# Altium PCB PCB1.PcbDoc
Units mm, origin at the board's own origin, x right, y up, seen from the top; angles counter-clockwise.
Board outline 85 x 60 mm, 2 copper layers (Top Layer, Bottom Layer); 28 components, 11 nets, 34 pads, 8 vias.
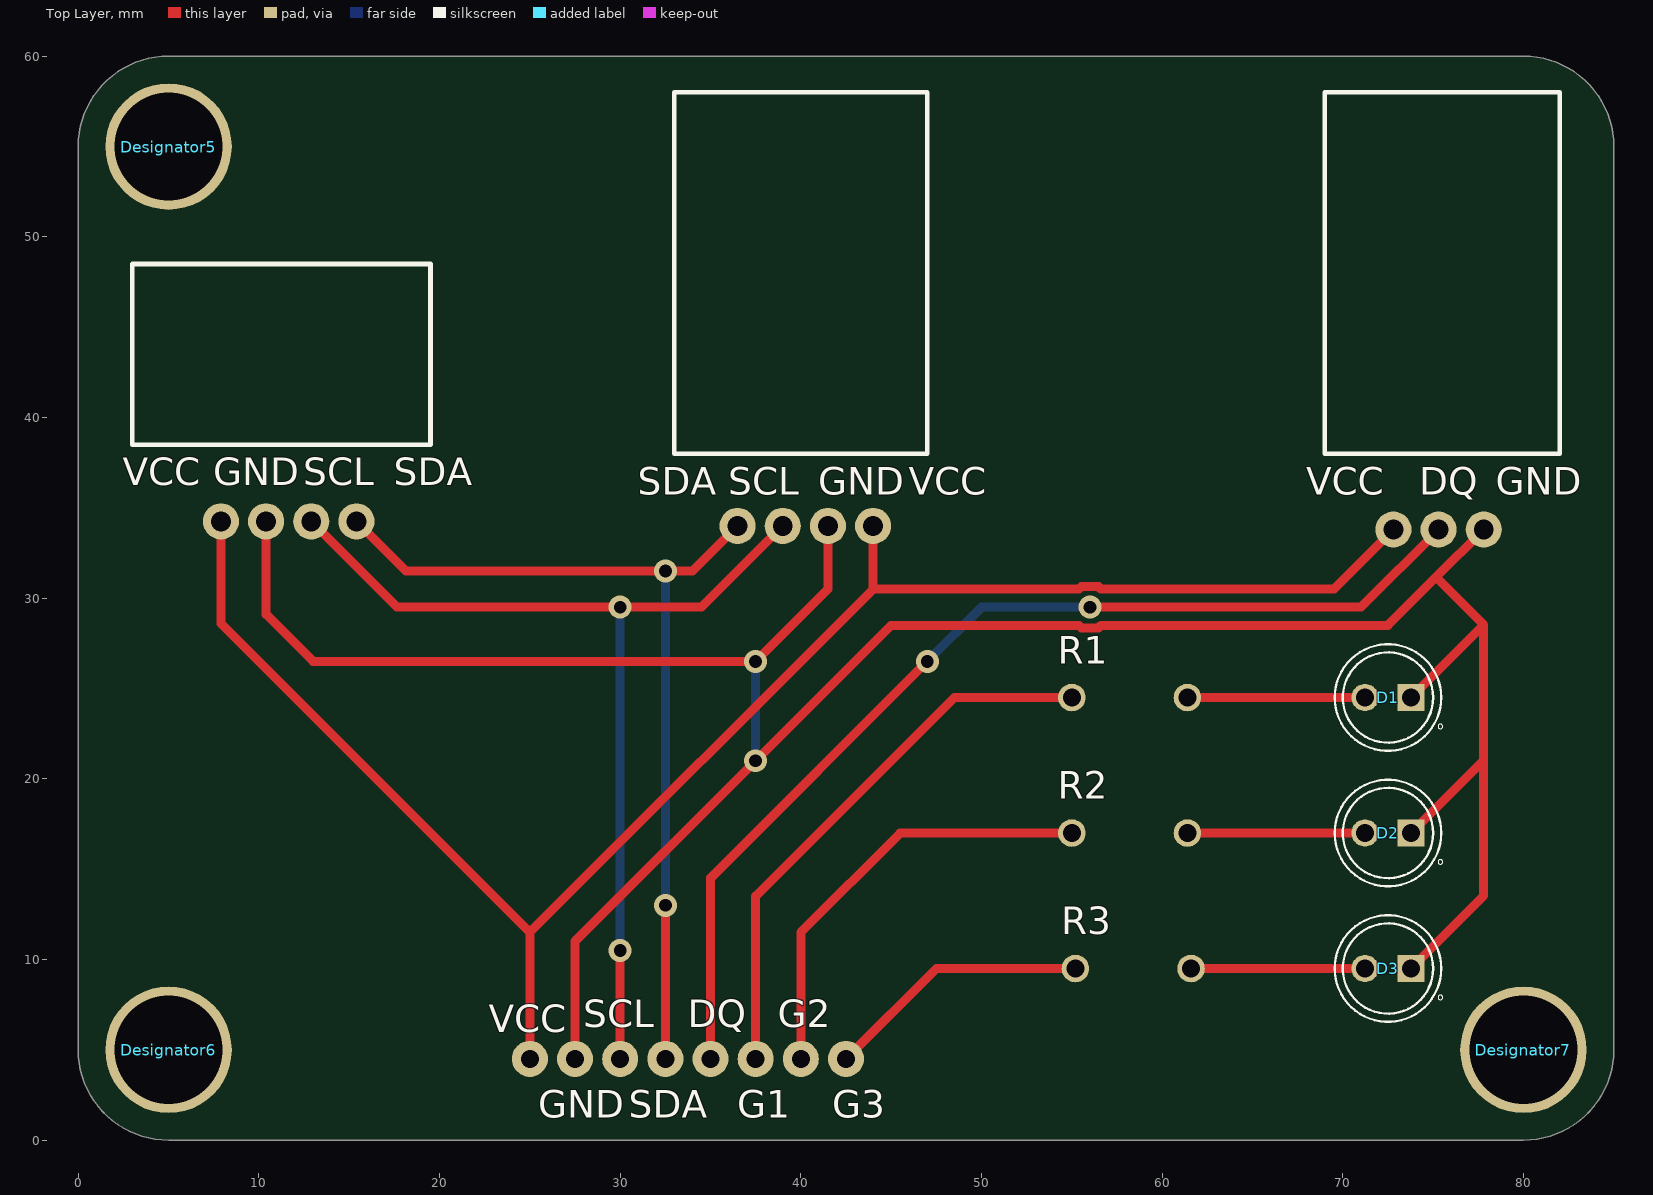
[diagram p0: Top Layer view]
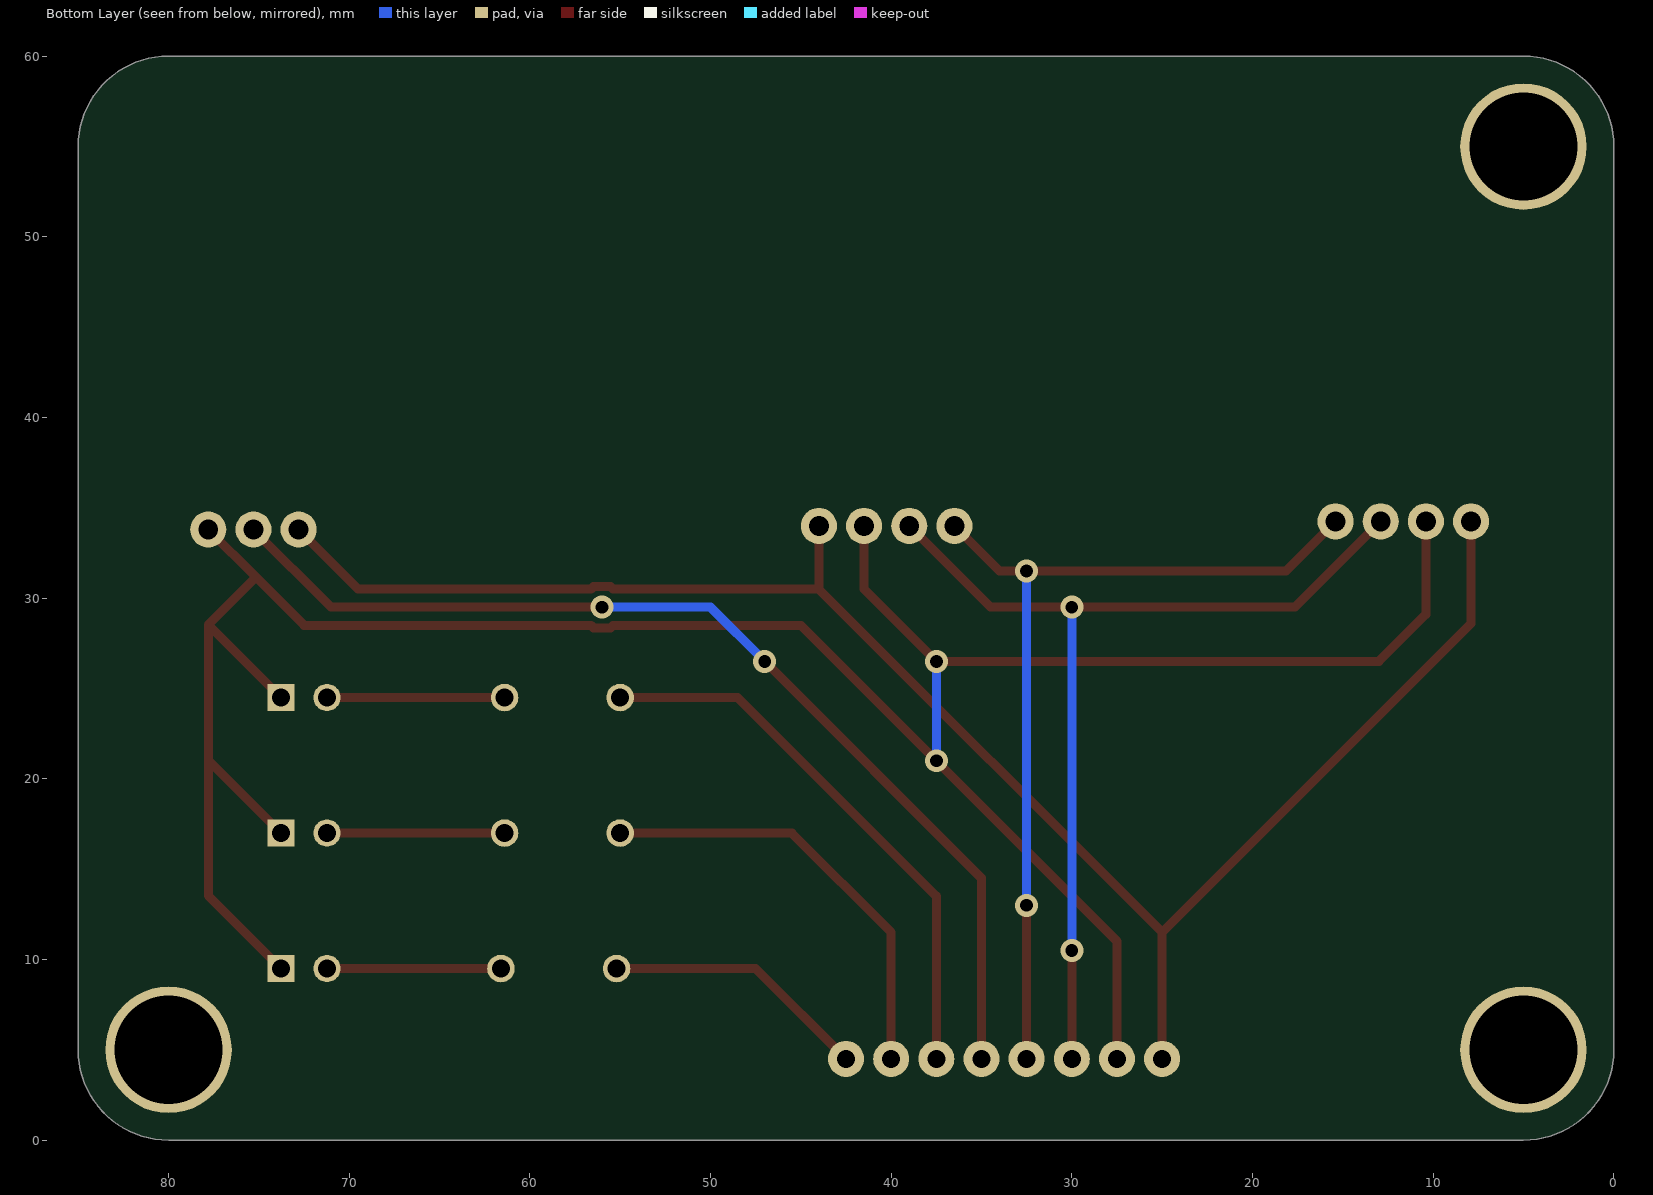
[diagram p1: Bottom Layer view, seen from below]
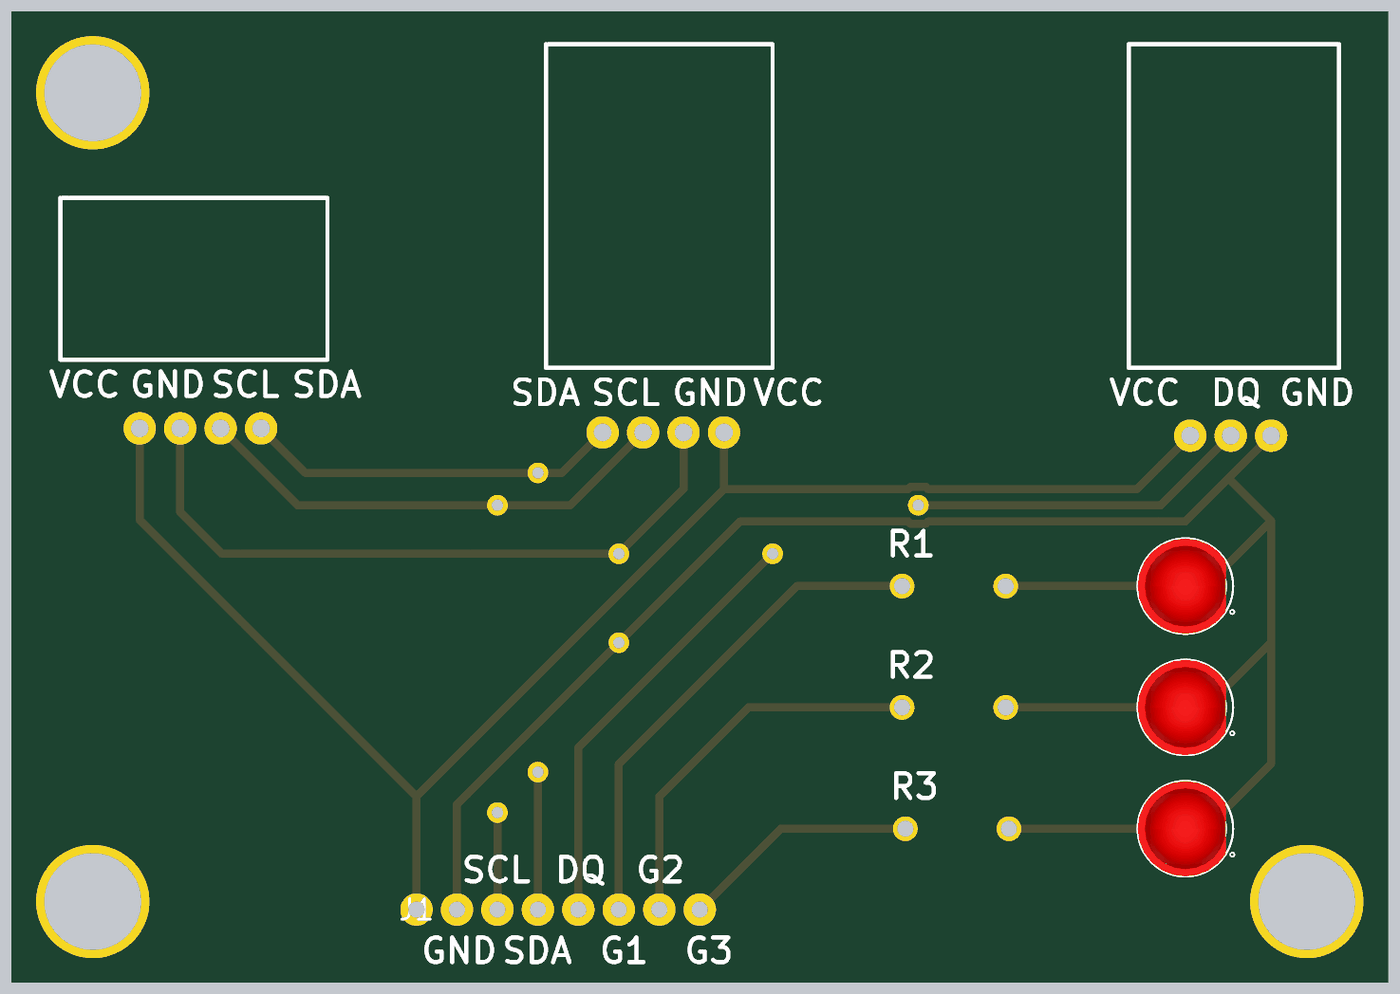
[diagram p2: 3D render of the assembled board from above, using the file's embedded part models]

## Layer stack, top to bottom
Top Solder: solder mask 0.0102, Solder Resist, Dk 3.5
Top Layer: signal copper 0.0356
Dielectric 1: dielectric 0.32, FR-4, Dk 4.8
Bottom Layer: signal copper 0.0356
Bottom Solder: solder mask 0.0102, Solder Resist, Dk 3.5

## Board outline
0,5 ccw(c5,5) 5,0 80,0 ccw(c80,5) 85,5 85,55 ccw(c80,55) 80,60 5,60 ccw(c5,55) 0,55

## Design rules (kind name [scope] priority, off if disabled: settings)
Clearance [All] p1: gap=0.254 ignorepadtopadclearanceinfootprint=FALSE
PolygonConnect [All] p1: connectstyle=Relief reliefconductorwidth=0.254 reliefentries=4 polygonreliefangle="90 Angle" airgapwidth=0.254
RoutingVias [All] p1: holewidth=0.711 width=1.27 viastyle="Through Hole" minholewidth=0.711 minwidth=1.27 maxholewidth=0.711 maxwidth=1.27
SolderMaskExpansion [All] p1: expansion=0 istentingtop=FALSE
Width [All] p1: maxlimit=1 minlimit=0.254 preferedwidth=0.5
30 further rules are at their usual default settings.

## Classes and differential pairs
component class Sheet1: D1 D2 D3 DQ G1 G2 G3 R1 R2 R3 VCC

## Components (designator, comment, footprint, x,y, rotation, side; value= is the part's Value field where it differs from the comment)
D1 "WP7113ID" LED_WP7113ID 72.5,24.5 r180 top
D2 "WP7113ID" LED_WP7113ID 72.5,17 r180 top
D3 "WP7113ID" LED_WP7113ID 72.5,9.5 r180 top
Designator5 "Comment" Mount_hole_pcb 5,55 r0 top
Designator6 "Comment" Mount_hole_pcb 5,5 r0 top
Designator7 "Comment" Mount_hole_pcb 80,5 r0 top
DQ "DQ" Pad_pcb 75.3,33.8 r0 top (schematic designator P10)
DQ "TS-101-X-A-1" SAMTEC_TS-101-X-A-1 35,4.5 r0 top (schematic designator J5)
G1 "TS-101-X-A-1" SAMTEC_TS-101-X-A-1 37.5,4.5 r0 top (schematic designator J6)
G2 "TS-101-X-A-1" SAMTEC_TS-101-X-A-1 40,4.5 r0 top (schematic designator J7)
G3 "TS-101-X-A-1" SAMTEC_TS-101-X-A-1 42.5,4.5 r0 top (schematic designator J8)
GND "GND" Pad_pcb 77.8,33.8 r0 top (schematic designator P11)
GND "SCL" Pad_pcb 41.5,34 r0 top (schematic designator P6)
GND "GND" Pad_pcb 10.4,34.25 r0 top (schematic designator P2)
GND "TS-101-X-A-1" SAMTEC_TS-101-X-A-1 27.5,4.5 r0 top (schematic designator J2)
R1 "ERJU02F3600X" RES_ERJU02F3600X 57.8,24.5 r0 top
R2 "ERJU02F3600X" RES_ERJU02F3600X 57.8,17 r0 top
R3 "ERJU02F3600X" RES_ERJU02F3600X 58,9.5 r0 top
SCL "GND" Pad_pcb 39,34 r0 top (schematic designator P7)
SCL "SCL" Pad_pcb 12.9,34.25 r0 top (schematic designator P3)
SCL "TS-101-X-A-1" SAMTEC_TS-101-X-A-1 30,4.5 r0 top (schematic designator J3)
SDA "VCC" Pad_pcb 36.5,34 r0 top (schematic designator P8)
SDA "SDA" Pad_pcb 15.4,34.25 r0 top (schematic designator P4)
SDA "TS-101-X-A-1" SAMTEC_TS-101-X-A-1 32.5,4.5 r0 top (schematic designator J4)
VCC "VCC" Pad_pcb 72.8,33.8 r0 top (schematic designator P9)
VCC "SDA" Pad_pcb 44,34 r0 top (schematic designator P5)
VCC "VCC" Pad_pcb 7.9,34.25 r0 top (schematic designator P1)
VCC "TS-101-X-A-1" SAMTEC_TS-101-X-A-1 25,4.5 r0 top (schematic designator J1)

## Footprints (in the part's own frame and the unit in brackets; to place one, negate y for a bottom-side part, rotate by r counter-clockwise, add the part's x,y. Pads: shape width x height; smd on the part's side, far side on the other; paste and mask are expansions set on the pad)
LED_WP7113ID [mm]
  round 1.508 hole 1: A(1.27,0)
  rect 1.508x1.508 / inner round 1.508 / far side rect 1.508x1.508 hole 1: C(-1.27,0)
  silkscreen extent -3.03,-2.95 2.95,2.95, body extent -2.5,-2.95 2.95,2.95, height 9.6
Mount_hole_pcb [mm]
  round 7 hole 6: 1(0,0)
Pad_pcb [mm]
  round 2 hole 1.1: 1(0,0)
RES_ERJU02F3600X [mm]
  round 1.524 hole 1: 1(-2.8,0) 2(3.6,0)
SAMTEC_TS-101-X-A-1 [mm]
  round 2 hole 1: 1(0,0)

## Part data
D1 D2 D3: "Red 617nm LED Indication - Discrete 2V Radial", Package="Radial Kingbright", Availability="In Stock", Check_prices=https://www.snapeda.com/parts/WP7113ID/Kingbright/view-part/?ref=eda, MF=Kingbright, MP=WP7113ID, Price=None, Purchase-URL=https://pricing.snapeda.com/search/part/WP7113ID/?ref=eda, SnapEDA_Link=https://www.snapeda.com/parts/WP7113ID/Kingbright/view-part/?ref=snap
DQ GND GND GND SCL SCL SDA SDA VCC VCC VCC: library part Pad
DQ G1 G2 G3 GND SCL SDA VCC: "1 Position Header Connector Male Pin Gold", Package=None, Check_prices=https://www.snapeda.com/parts/TS-101-G-A-1/Samtec+Inc./view-part/?ref=eda, MF="Samtec Inc.", MP=TS-101-G-A-1, SnapEDA_Link=https://www.snapeda.com/parts/TS-101-G-A-1/Samtec+Inc./view-part/?ref=snap
R1 R2 R3: Package=None, Availability=Unavailable, MP=ERJU02F3600X, Price=None

## Via types
v1: diameter 1.27, hole 0.711, Top Layer to Bottom Layer, 8 vias

## Nets (pads, with @x,y where several pads share a name; then routed paths per layer and width w, separated by ;. In a path a pad name is that pad's centre, name@x,y a point inside that pad or via, vN(x,y) a via of type N, cw(c..) or ccw(c..) an arc to the next point about the centre after c; other vN are vias at no path point)
NetD1_A: D1.A R1.2 | length 9.8
  Top Layer w0.5: R1.2 D1.A
NetD1_C: D1.C D2.C D3.C GND.1 | length 150.2
  Top Layer w0.5: GND.1@10.4,34.25 10.4,29.1 13,26.5 v1(37.5,26.5) 41.5,30.5 GND.1@41.5,34 ; GND.1@27.5,4.5 27.5,11 v1(37.5,21) 45,28.5 55.389,28.5 55.528,28.361 56.472,28.361 56.611,28.5 72.5,28.5 75.15,31.15 ; D3.C 77.8,13.53 77.8,21.03 ; D2.C 77.8,21.03 ; D1.C 77.8,28.53 ; GND.1@77.8,33.8 75.15,31.15 ; 75.15,31.15 75.18,31.15 77.8,28.53 ; 77.8,21.03 77.8,28.53
  Bottom Layer w0.5: v1(37.5,21) v1(37.5,26.5)
NetD2_A: D2.A R2.2 | length 9.8
  Top Layer w0.5: R2.2 D2.A
NetD3_A: D3.A R3.2 | length 9.6
  Top Layer w0.5: R3.2 D3.A
NetJ1_1: VCC.1 | length 97.5
  Top Layer w0.5: VCC.1@7.9,34.25 7.9,28.6 25,11.5 ; VCC.1@25,4.5 25,11.5 ; VCC.1@44,34 44,30.501 ; VCC.1@72.8,33.8 69.501,30.501 56.61,30.501 56.472,30.639 55.528,30.639 55.39,30.501 44,30.501 ; 25,11.5 44,30.501
NetJ3_1: SCL.1 | length 54.9
  Top Layer w0.5: SCL.1@12.9,34.25 17.65,29.5 v1(30,29.5) 34.5,29.5 SCL.1@39,34 ; SCL.1@30,4.5 v1(30,10.5)
  Bottom Layer w0.5: v1(30,10.5) v1(30,29.5)
NetJ4_1: SDA.1 | length 50.3
  Top Layer w0.5: SDA.1@15.4,34.25 18.15,31.5 v1(32.5,31.5) 34,31.5 SDA.1@36.5,34 ; SDA.1@32.5,4.5 v1(32.5,13)
  Bottom Layer w0.5: v1(32.5,13) v1(32.5,31.5)
NetJ5_1: DQ.1 | length 58.3
  Top Layer w0.5: DQ.1@35,4.5 35,14.5 v1(47,26.5) ; v1(56,29.5) 71,29.5 DQ.1@75.3,33.8
  Bottom Layer w0.5: v1(47,26.5) 50,29.5 v1(56,29.5)
NetJ6_1: G1.1 R1.1 | length 31.1
  Top Layer w0.5: G1.1 37.5,13.5 48.5,24.5 R1.1
NetJ7_1: G2.1 R2.1 | length 24.3
  Top Layer w0.5: G2.1 40,11.5 45.5,17 R2.1
NetJ8_1: G3.1 R3.1 | length 14.8
  Top Layer w0.5: G3.1 47.5,9.5 R3.1
pads on no net: Designator5.1 Designator6.1 Designator7.1

## Silkscreen, mask and mechanical layers (free items; w line width, h text height)
Top Overlay:
  lines w0.254: 3,38.5 3,48.5 3.5,48.5 19.5,48.5 19.5,38.5 3,38.5 ; 33,38 33,58 47,58 47,38 33,38 ; 69,38 69,58 82,58 82,38 69,38
Mechanical 1:
  circle w0.254: c80,5 r3
  circle w0.254: c5,55 r3
  circle w0.254: c5,5 r3
  lines w0.254: 0,5 ccw(c5,5) 5,0 80,0 ccw(c80,5) 85,5 85,55 ccw(c80,55) 80,60 5,60 ccw(c5,55) 0,55 0,5